# Altium PCB PCB1.PcbDoc
Units mm, origin at the board's own origin, x right, y up, seen from the top; angles counter-clockwise.
Board outline 95.25 x 86.87 mm, 2 copper layers (Top Layer, Bottom Layer); 64 components, 25 nets, 258 pads, 0 vias.
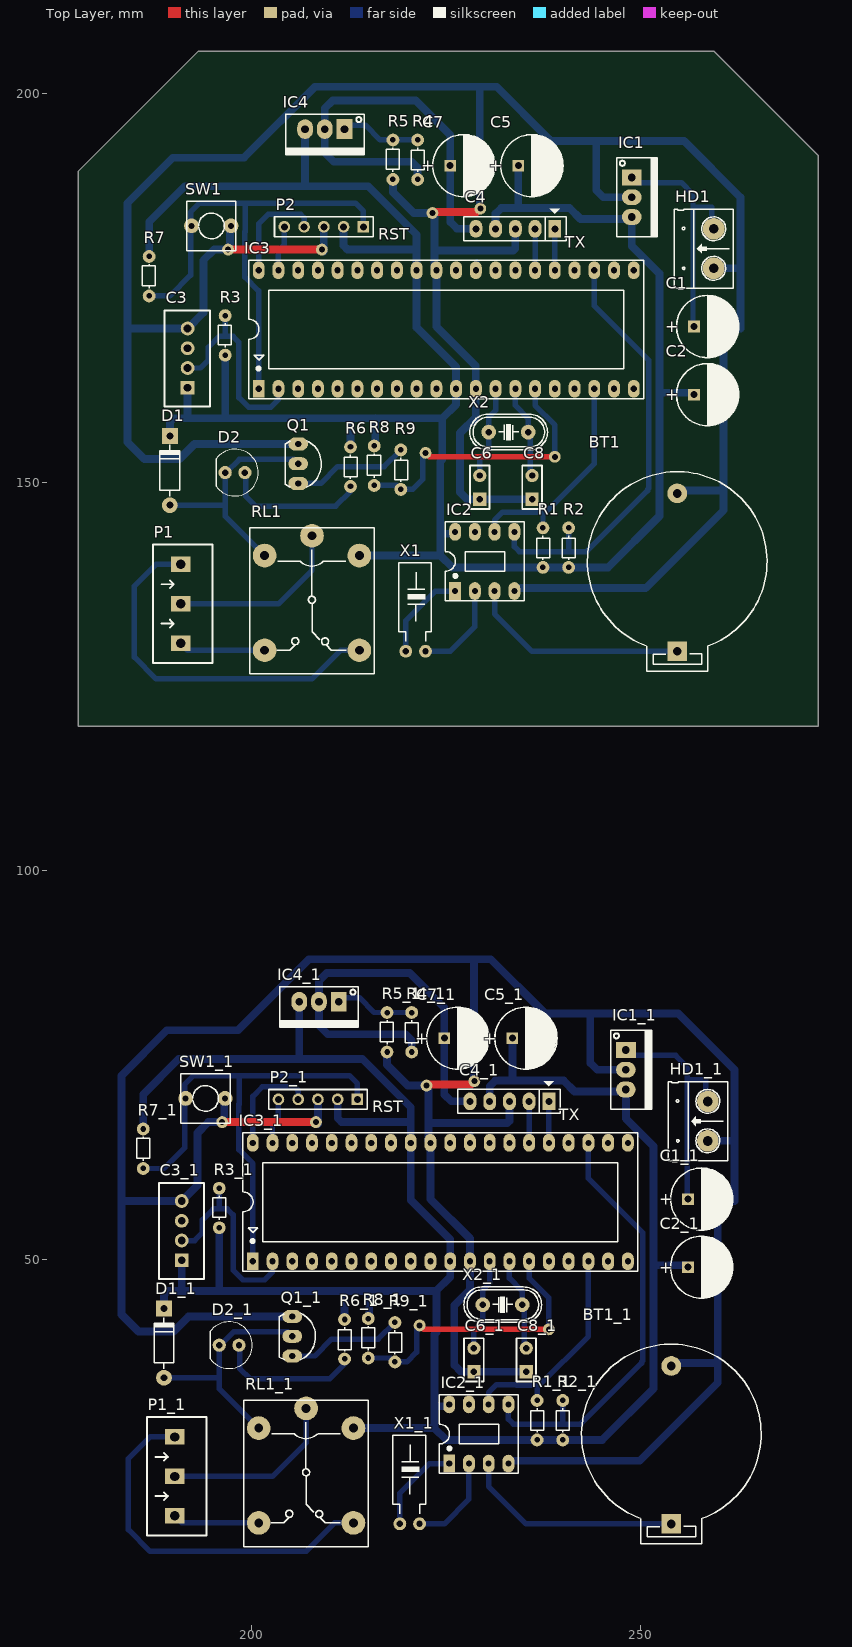
[diagram p0: Top Layer view]
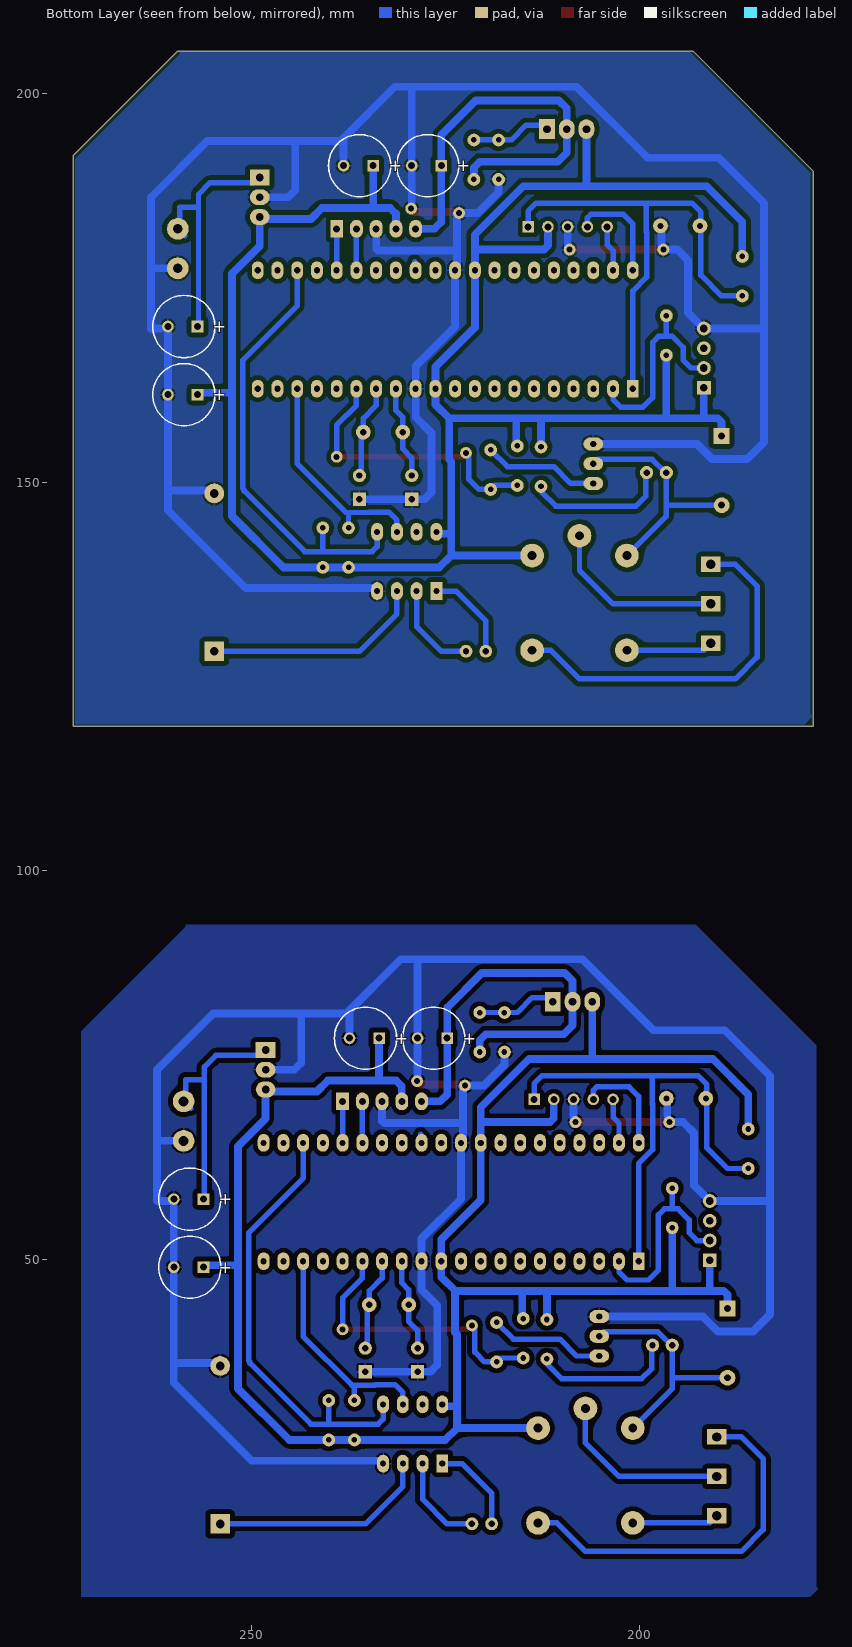
[diagram p1: Bottom Layer view, seen from below]

## Layer stack, top to bottom
Top Solder: solder mask 0.0102, Solder Resist, Dk 3.5
Top Layer: signal copper 0.0356
Dielectric 1: dielectric 0.32, FR-4, Dk 4.8
Bottom Layer: signal copper 0.0356
Bottom Solder: solder mask 0.0102, Solder Resist, Dk 3.5

## Board outline
177.673,118.618 177.673,189.992 193.167,205.486 259.461,205.486 272.923,192.024 272.923,118.618

## Design rules (kind name [scope] priority, off if disabled: settings)
Clearance [All] p1: gap=0.6 ignorepadtopadclearanceinfootprint=FALSE
PlaneClearance [All] p1: clearance=0.6
PolygonConnect [All] p1: connectstyle=Relief reliefconductorwidth=0.254 reliefentries=4 polygonreliefangle="90 Angle" airgapwidth=0.254
RoutingVias [All] p1: holewidth=0.711 width=1.27 viastyle="Through Hole" minholewidth=0.711 minwidth=1.27 maxholewidth=0.711 maxwidth=1.27
SolderMaskExpansion [All] p1: expansion=0.102
Width Width_1 [InNet('3.3V')] p1: maxlimit=1 minlimit=1 preferedwidth=1
Width GND [InNet('GND')] p2: maxlimit=1 minlimit=1 preferedwidth=1
Width VCC [InNet('VCC')] p3: maxlimit=1 minlimit=1 preferedwidth=1
Width [All] p4: maxlimit=0.7 minlimit=0.7 preferedwidth=0.7
29 further rules are at their usual default settings.

## Classes and differential pairs
component class sh: BT1 C1 C2 C3 C6 C7 C8 D1 D2 HD1 IC1 IC2 IC3 IC4 P1 P2 Q1 R1 R2 R3 R6 R7 R8 R9 RL1 SW1 X1 X2

## Components (designator, comment, footprint, x,y, rotation, side; value= is the part's Value field where it differs from the comment)
BT1 "PIN 3V" PIN3V 254.762,128.27 r90 top
BT1_1 "PIN 3V" PIN3V 254,16.002 r90 top (schematic designator BT1)
C1 "Cap Pol" "RADIAL E" 256.921,170.053 r0 top value=10uF
C1_1 "Cap Pol" "RADIAL E" 256.159,57.785 r0 top value=10uF (schematic designator C1)
C2 "Cap Pol" "RADIAL E" 256.921,161.29 r0 top value=10uF
C2_1 "Cap Pol" "RADIAL E" 256.159,49.022 r0 top value=10uF (schematic designator C2)
C3 "DHT11" DHT11 191.77,162.179 r90 top
C3_1 "DHT11" DHT11 191.008,49.911 r90 top (schematic designator C3)
C4 "JP5" JP5 239.014,182.626 r180 top
C4_1 "JP5" JP5 238.252,70.358 r180 top (schematic designator C4)
C5 "Cap Pol" "RADIAL E" 234.315,190.754 r0 top value=220uF
C5_1 "Cap Pol" "RADIAL E" 233.553,78.486 r0 top value=220uF (schematic designator C5)
C6 "Cap Non-pol" "Cap Non-Pol 3mm" 229.362,149.352 r90 top value=22pF
C6_1 "Cap Non-pol" "Cap Non-Pol 3mm" 228.6,37.084 r90 top value=22pF (schematic designator C6)
C7 "Cap Pol" "RADIAL E" 225.552,190.754 r0 top value=10uF
C7_1 "Cap Pol" "RADIAL E" 224.79,78.486 r0 top value=10uF (schematic designator C7)
C8 "Cap Non-pol" "Cap Non-Pol 3mm" 236.093,149.352 r90 top value=22pF
C8_1 "Cap Non-pol" "Cap Non-Pol 3mm" 235.331,37.084 r90 top value=22pF (schematic designator C8)
D1 "1N4007" D1A 189.484,147.066 r270 top
D1_1 "1N4007" D1A 188.722,34.798 r270 top (schematic designator D1)
D2 "LED" "LED-0 5mm BLUE" 197.866,151.257 r270 top
D2_1 "LED" "LED-0 5mm BLUE" 197.104,38.989 r270 top (schematic designator D2)
HD1 "Header 2" HED2 259.461,177.546 r90 top
HD1_1 "Header 2" HED2 258.699,65.278 r90 top (schematic designator HD1)
IC1 "LM7805" QTO-220 248.92,189.23 r270 top
IC1_1 "LM7805" QTO-220 248.158,76.962 r270 top (schematic designator IC1)
IC2 "DS1307" DIP8/W0.3 226.187,136.017 r0 top
IC2_1 "DS1307" DIP8/W0.3 225.425,23.749 r0 top (schematic designator IC2)
IC3 "18F4520" DIP40/W0.6 200.914,162.052 r0 top
IC3_1 "18F4520" DIP40/W0.6 200.152,49.784 r0 top (schematic designator IC3)
IC4 "LM317" QTO-220 211.963,195.453 r180 top
IC4_1 "LM317" QTO-220 211.201,83.185 r180 top (schematic designator IC4)
P1 "Header 3 - M" "Medium - Header 3" 190.881,139.446 r270 top
P1_1 "Header 3 - M" "Medium - Header 3" 190.119,27.178 r270 top (schematic designator P1)
P2 "ICSP-PIC" HDR1X5 214.376,182.88 r180 top
P2_1 "ICSP-PIC" HDR1X5 213.614,70.612 r180 top (schematic designator P2)
Q1 "C1815" QTO-92 205.994,152.4 r270 top
Q1_1 "C1815" QTO-92 205.232,40.132 r270 top (schematic designator Q1)
R1 "4k7" R1/8W 237.49,141.605 r270 top value="R1/4W - 1K"
R1_1 "4k7" R1/8W 236.728,29.337 r270 top value="R1/4W - 1K" (schematic designator R1)
R2 "4k7" R1/8W 240.792,141.605 r270 top value="R1/4W - 1K"
R2_1 "4k7" R1/8W 240.03,29.337 r270 top value="R1/4W - 1K" (schematic designator R2)
R3 "4k7" R1/8W 196.596,168.91 r90 top value="R1/4W - 1K"
R3_1 "4k7" R1/8W 195.834,56.642 r90 top value="R1/4W - 1K" (schematic designator R3)
R4 "240" R1/8W 221.361,191.516 r270 top value="R1/4W - 1K"
R4_1 "240" R1/8W 220.599,79.248 r270 top value="R1/4W - 1K" (schematic designator R4)
R5 "390" R1/8W 218.186,191.516 r90 top value="R1/4W - 1K"
R5_1 "390" R1/8W 217.424,79.248 r90 top value="R1/4W - 1K" (schematic designator R5)
R6 "1k" R1/8W 212.725,152.019 r270 top value="R1/4W - 1K"
R6_1 "1k" R1/8W 211.963,39.751 r270 top value="R1/4W - 1K" (schematic designator R6)
R7 "10k" R1/8W 186.817,176.53 r90 top value="R1/4W - 1K"
R7_1 "10k" R1/8W 186.055,64.262 r90 top value="R1/4W - 1K" (schematic designator R7)
R8 "10k" R1/8W 215.773,152.146 r90 top value="R1/4W - 1K"
R8_1 "10k" R1/8W 215.011,39.878 r90 top value="R1/4W - 1K" (schematic designator R8)
R9 "1k" R1/8W 219.202,151.638 r270 top value="R1/4W - 1K"
R9_1 "1k" R1/8W 218.44,39.37 r270 top value="R1/4W - 1K" (schematic designator R9)
RL1 "Relay 10A/12V" RL_SPDT_10A 207.772,143.129 r270 top value="Relay SPDT, 10A, 12V"
RL1_1 "Relay 10A/12V" RL_SPDT_10A 207.01,30.861 r270 top value="Relay SPDT, 10A, 12V" (schematic designator RL1)
SW1 "SW" SW2 197.358,183.007 r180 top value="SW chip 2 pin"
SW1_1 "SW" SW2 196.596,70.739 r180 top value="SW chip 2 pin" (schematic designator SW1)
X1 "32,768 Khz" XT32k 219.837,128.27 r90 top value=32,768khz
X1_1 "32,768 Khz" XT32k 219.075,16.002 r90 top value=32,768khz (schematic designator X1)
X2 "8Mhz" XT2 233.045,156.464 r180 top value=4Mhz
X2_1 "8Mhz" XT2 232.283,44.196 r180 top value=4Mhz (schematic designator X2)

## Footprints (in the part's own frame and the unit in brackets; to place one, negate y for a bottom-side part, rotate by r counter-clockwise, add the part's x,y. Pads: shape width x height; smd on the part's side, far side on the other; paste and mask are expansions set on the pad)
"Cap Non-Pol 3mm" [mil] "Capacitor, Radial; Body 5.6 x 2.5 mm (L x W typ); Pin Spacing 3 mm (typ); Solder Pad 35mil"
  rect 67x67 hole 32: 1(-60,0)
  round 67 hole 32: 2(60,0)
  silkscreen extent -110,-50 110,50, body extent -115,-33 115,34, height 245
D1A [mil] "Diode 1A, W 100mil, L 350mil"
  round 80 hole 35: 1(0,0)
  rect 80x80 hole 35: 2(-350,0)
  silkscreen extent -305,-50 -45,50, body extent -386,-33 34,36, height 84
DHT11 [mil]
  rect 70x70 hole 39.37 unplated: 1(0,0)
  round 70 hole 39.37 unplated: 2(100,0) 3(200,0)
  round 70 hole 39.37 unplated mask+4: 4(300,0)
  silkscreen extent -94,-114 392,116, body extent -87,-107 385,110, height 611
DIP8/W0.3 [mil] "8 PIN, W 300mil, Pin to pin 100mil"
  rect 60x90 hole 31: 1(0,0)
  oval 60x90 hole 31: 2(100,0) 3(200,0) 4(300,0) 5(300,300) 6(200,300) 7(100,300) 8(0,300)
  silkscreen extent -50,-50 350,350, body extent -50,-40 350,336, height 201
DIP40/W0.6 [mil] "40 PIN, W 600mil, Pin to pin 100mil"
  rect 60x90 hole 31: 1(0,0)
  oval 60x90 hole 31: 2(100,0) 3(200,0) 4(300,0) 5(400,0) 6(500,0) 7(600,0) 8(700,0) 9(800,0) 10(900,0) 11(1000,0) 12(1100,0) 13(1200,0) 14(1300,0) 15(1400,0) 16(1500,0) 17(1600,0) 18(1700,0) 19(1800,0) 20(1900,0) 21(1900,600) 22(1800,600) 23(1700,600) 24(1600,600) 25(1500,600) 26(1400,600) 27(1300,600) 28(1200,600) 29(1100,600) 30(1000,600) 31(900,600) 32(800,600) 33(700,600) 34(600,600) 35(500,600) 36(400,600) 37(300,600) 38(200,600) 39(100,600) 40(0,600)
  silkscreen extent -50,-50 1950,650, body extent -82,-10 1982,600, height 224
HDR1X5 [mm] "Connector; Header; 5 Position"
  rect 1.5x1.5 hole 0.9: 1(0,0)
  round 1.5 hole 0.9: 2(2.54,0) 3(5.08,0) 4(7.62,0) 5(10.16,0)
  silkscreen extent -1.27,-1.27 11.43,1.27, body extent -1.27,-1.27 11.43,1.27, height 7
HED2 [mil] "Header 2, 2 pin, hight 300mil, Pin to Pin 200, Colour Green"
  round 110 hole 50: 1(0,0) 2(200,0)
  silkscreen extent -106,-100 300,200, body extent -92,-140 302,155, height 394
JP5 [mil] "JP5"
  rect 65x90 hole 36: 1(0,0)
  oval 65x90 hole 36: 2(100,0) 3(200,0) 4(300,0) 5(400,0)
  silkscreen extent -57,-101 461,60, body extent -48,-53 448,45, height 323
"LED-0 5mm BLUE" [mil] "Typical LED; BLUE; 2 Leads; Solder Pad 35mil"
  round 67 hole 32: 1(0,50) 2(0,-50)
  silkscreen extent -118,-96 118,118, body extent -118,-96 119,117, height 345
"Medium - Header 3" [mm]
  rect 2x2.5 hole 1.2: 1(0,0) 2(5.08,0) 3(10.147,0)
  silkscreen extent -2.54,-3.58 12.7,4.06, body extent -2.42,-3.51 12.58,3.99, height 10
PIN3V [mil] "Socket PIN 3V"
  rect 100x100 hole 45: 1(0,0)
  round 100 hole 45: 2(800,0)
  silkscreen extent -100,-455 910,455, body extent -128,-447 1002,449, height 278
QTO-92 [mil] "TO-92"
  oval 66x100 hole 32: 1(-100,0) 2(0,0) 3(100,0)
  silkscreen extent -117,-65 120,118, body extent -109,-66 109,95, height 245
QTO-220 [mil] "TO-220 - 1-2-3"
  rect 80x100 hole 39: 1(0,0)
  oval 80x100 hole 39: 2(100,0) 3(200,0)
  silkscreen extent -100,-76 300,130, body extent -119,-64 322,121, height 755
R1/8W [mil] "R 1/8W, 2 pin, 300mil"
  round 65 hole 28: 1(-100,0) 2(100,0)
  silkscreen extent -60,-32 61,34, body extent -135,-35 135,37, height 86
"RADIAL E" [mm] "Capacitor, Electrolytic, Radial; Body 8 x 10.5 mm (Dia.xH typ); Pin Spacing 3.5 mm (typ)"
  rect 1.5x1.5 hole 0.9: 1(0,0)
  round 1.5 hole 0.9: 2(3.81,0)
  silkscreen extent -2.25,-4 5.75,4, body extent -2.24,-3.99 5.76,4.01, height 11.74
RL_SPDT_10A [mil] "Relay SPDT, 5 pin, 10A,W 650mil, L 800mil, H 800mil"
  round 120 hole 45: 1(0,0) 2(580,240) 3(580,-240) 4(100,-240) 5(100,240)
  silkscreen extent -40,-315 700,315
SW2 [mil] "SW button 2pin, 250x 250 mil"
  round 75 hole 31: 1(0,0) 2(200,0)
  silkscreen extent -25,-125 225,125
XT2 [mil] "Footpin for Crystal 2 pin"
  round 75 hole 34: 1(-100,0) 2(100,0)
  silkscreen extent -198,-90 195,90, body extent -233,-93 213,90, height 138
XT32k [mil] "Crystal 32k, 2 pin, real timer for DS1307"
  round 65 hole 32: 1(0,0) 2(0,-100)
  silkscreen extent 50,-130 449,36

## Part data
BT1 BT1_1: "Battery 3VDC"
C1 C1_1 C2 C2_1 C5 C5_1 C7 C7_1: "Polarized Capacitor", LatestRevisionDate=17-Jul-2002, LatestRevisionNote="Re-released for DXP Platform.", PackageReference=POLAR0.8, Published=8-Jun-2000, Publisher="Altium Limited"
C3 C3_1: Manufacturer="Würth Elektronik eiSos GmbH", partNo=613004143121, ComponentLink1 Description=Manufacturer, ComponentLink1URL=http://www.we-online.com, ComponentLink2 Description=Datasheet, ComponentLink2URL=http://katalog.we-online.de/em/datasheet/6130xx143121.pdf, Created by="Karrer Zheng", Created Date="29 March 2013", NoPins=04
C6 C6_1 C8 C8_1: "Non-polarized Capacitor", LatestRevisionDate=17-Jul-2002, LatestRevisionNote="Re-released for DXP Platform.", PackageReference=RAD-0.3, Published=8-Jun-2000, Publisher="Altium Limited"
D1 D1_1: library part D1A, "Diode 1A"
D2 D2_1: "Typical LED", LatestRevisionDate=08-Jul-2005, LatestRevisionNote="Mech Layer 1 removed.", PackageReference=LED-1, Published=8-Jun-2000, Publisher="Altium Limited"
HD1 HD1_1: library part Hed2, "Header 2 (Green)"
IC1 IC1_1: library part LM78xx, "On ap +, from + 5 to + 24VDC", =LM7808
IC2 IC2_1: "Real Timer Serial"
IC3 IC3_1: "32KB Flash, 1536B RAM, 256B EFROM, 40-Pin PDIP", Copyright by=VanDungEvn
IC4 IC4_1: library part LM317_1, "Adj Voltage +1.2 -> +37V"
P1 P1_1: "Header, 3-Pin, Medium", LatestRevisionDate=17-Jul-2002, LatestRevisionNote="Re-released for DXP Platform.", Publisher="Altium Limited"
P2 P2_1: "Header, 5-Pin", LatestRevisionDate=17-Jul-2002, LatestRevisionNote="Re-released for DXP Platform.", Publisher="Altium Limited"
Q1 Q1_1: library part C1815_1, "NPN 600mW, ECB", =C2383
R1 R1_1 R2 R2_1 R3 R3_1 R4 R4_1 R5 R5_1 R6 R6_1 R7 R7_1 R8 R8_1 R9 R9_1: library part R, "Resistor 1/4W"
RL1 RL1_1: library part "Relay 1", "Relay SPDT,10A - 12VDC 5 Pin", ="Relay SPDT, 10A, 24V"
SW1 SW1_1: library part SW2, "Switch button 2 pin"
X1 X1_1: library part XT32k, "Crystal 32,768kHz for timer real"
X2 X2_1: library part XT2, "Crystal For all Crystal 2pin."

## Free pads (board coordinates)
  round 1.524 hole 0.762: 2(222.504,72.39) 2(223.266,184.658) 3(228.663,72.962) 3(229.425,185.23) 4(208.28,67.691) 4(209.042,179.959) 5(196.215,67.691) 5(196.977,179.959) 6(221.615,41.529) 6(222.377,153.797) 7(238.252,41.021) 7(239.014,153.289)

## Nets (pads, with @x,y where several pads share a name; then routed paths per layer and width w, separated by ;. In a path a pad name is that pad's centre, name@x,y a point inside that pad or via, vN(x,y) a via of type N, cw(c..) or ccw(c..) an arc to the next point about the centre after c; other vN are vias at no path point)
3.3V: C4.5 C7.1 IC4.2 R4.2 | length 53.2
  Bottom Layer w1: R4.2 221.361,190.5 220.599,191.262 210.566,191.262 209.423,192.405 IC4.2 209.423,198.12 210.439,199.136 221.107,199.136 225.552,194.691 C7.1 225.552,183.515 226.441,182.626 C4.5
GND: BT1.2 C1.2 C2.2 C3.4 C4.3 C5.2 C6.1 C7.2 C8.1 HD1.1 IC1.2 IC2.4 IC3.12 IC3.31 P2.3 pad.2@223.266,184.658 pad.3@229.425,185.23 pad.4@209.042,179.959 pad.5@196.977,179.959 Q1.1 R5.1 SW1.1 | length 374.3
  Top Layer w1: pad.5@196.977,179.959 pad.4@209.042,179.959 ; pad.2@223.266,184.658 223.67,184.785 228.981,184.785 pad.3@229.425,185.23
  Bottom Layer w1: pad.5@196.977,179.959 195.199,179.959 193.802,178.562 193.802,171.831 C3.4 184.023,169.799 ; pad.5@197.231,179.918 SW1.1@197.231,182.626 ; Q1.1 192.659,154.94 190.729,153.01 186.207,153.01 184.023,155.194 184.023,169.799 ; pad.4@209.042,179.959 209.296,179.705 P2.3 ; R5.1 218.186,187.325 220.853,184.658 223.266,184.658 pad.2@223.583,184.468 ; pad.2@223.52,184.277 223.52,177.546 IC3.31 223.774,170.053 228.854,164.973 IC3.12 228.854,158.384 226.822,156.352 226.822,148.717 227.711,147.828 C6.1 C8.1 ; 223.774,179.832 233.664,179.832 233.934,180.102 C4.3 ; pad.3@229.489,185.166 229.425,185.23 229.362,185.293 C7.2 229.362,200.914 ; IC2.4 234.188,136.398 250.698,136.398 260.731,146.431 260.731,148.971 ; C5.2 238.125,194.056 238.252,194.183 ; IC1.2 245.237,186.69 244.348,187.579 244.348,193.929 ; BT1.2 255.143,148.971 260.731,148.971 ; HD1.1 262.636,177.546 ; 184.023,169.799 184.023,185.928 189.865,191.77 199.009,191.77 208.153,200.914 229.362,200.914 ; 229.362,200.914 231.521,200.914 238.252,194.183 ; 238.252,194.183 238.506,193.929 244.348,193.929 ; 244.348,193.929 255.651,193.929 262.89,186.69 262.89,169.799 260.985,169.799 C1.2 C2.2 260.731,148.971
NetBT1_1: BT1.1 IC2.3 | length 28.4
  Bottom Layer w0.7: IC2.3 231.267,133.096 236.093,128.27 BT1.1
NetC1_1: C1.1 HD1.2 IC1.1 | length 32.4
  Bottom Layer w0.7: IC1.1 249.594,188.556 255.309,188.556 256.794,187.071 256.794,185.42 ; C1.1 256.794,170.18 256.794,185.42 ; HD1.2@258.572,181.737 HD1.2 259.207,182.88 259.207,185.42 256.794,185.42
NetC3_2: C3.2 IC3.2 R3.2 | length 26.8
  Bottom Layer w0.7: C3.2 193.421,164.719 194.437,165.735 194.437,167.386 195.834,168.783 196.596,168.783 ; R3.2 196.596,168.783 ; IC3.2 203.454,160.655 202.438,159.639 199.644,159.639 198.374,160.909 198.374,168.021 197.612,168.783 196.596,168.783
NetC6_2: C6.2 IC3.13 X2.2 | length 12
  Bottom Layer w0.7: C6.2 229.362,153.162 230.505,154.305 X2.2 230.505,158.369 231.394,159.258 IC3.13
NetC8_2: C8.2 IC3.14 X2.1 | length 12.1
  Bottom Layer w0.7: IC3.14 233.934,159.893 235.585,158.242 X2.1 235.839,156.21 235.839,151.13 C8.2
NetD1_1: D1.1 D2.2 Q1.2 RL1.4 | length 30.2
  Bottom Layer w0.7: D1.1 196.596,147.066 ; RL1.4 196.596,145.669 196.596,147.066 ; Q1.2 205.436,152.958 198.431,152.958 196.731,151.257 D2.2 196.596,147.066
NetD2_1: D2.1 R6.2 | length 18.5
  Bottom Layer w0.7: D2.1 199.263,151.13 199.263,148.209 200.533,146.939 210.82,146.939 212.725,148.844 R6.2
NetIC2_1: IC2.1 X1.1 | length 11.9
  Bottom Layer w0.7: X1.1 219.837,132.207 223.647,136.017 IC2.1
NetIC2_2: IC2.2 X1.2 | length 12.2
  Bottom Layer w0.7: X1.2 225.552,128.27 228.727,131.445 IC2.2
NetIC4_1: IC4.1 R4.1 R5.2 | length 10.4
  Bottom Layer w0.7: IC4.1 212.471,195.961 214.63,195.961 216.535,194.056 R5.2 R4.1
NetP1_1: P1.1 RL1.2 | length 47.9
  Bottom Layer w0.7: P1.1 187.706,139.446 184.912,136.652 184.912,127.508 187.706,124.714 207.772,124.714 211.455,128.397 RL1.2
NetP1_2: P1.2 RL1.1 | length 23.1
  Bottom Layer w0.7: P1.2 203.454,134.366 207.772,138.684 RL1.1
NetP1_3: P1.3 RL1.3 | length 11.2
  Bottom Layer w0.7: P1.3 191.783,128.397 RL1.3
NetQ1_3: Q1.3 R9.1 | length 15
  Bottom Layer w0.7: Q1.3 208.915,149.86 211.074,152.019 217.043,152.019 R9.1
PGC: IC3.39 P2.5 | length 5.6
  Bottom Layer w0.7: IC3.39 203.454,179.832 204.216,180.594 P2.5@204.216,182.626
PGD: IC3.40 P2.4 | length 13.8
  Bottom Layer w0.7: IC3.40@200.787,177.292 IC3.40 200.914,183.261 202.133,184.48 206.324,184.48 206.756,184.048 P2.4
ROLE: IC3.15 pad.6@222.377,153.797 pad.7@239.014,153.289 R8.1 R9.2 | length 36.7
  Top Layer w0.7: pad.6@222.377,153.797 222.885,153.289 pad.7@239.014,153.289
  Bottom Layer w0.7: R8.1 218.694,149.606 R9.2 220.726,149.098 221.996,150.368 pad.6@221.996,153.67 ; IC3.15 236.474,159.893 239.014,157.353 pad.7@239.014,153.543
RST: IC3.1 P2.1 R7.1 SW1.2 | length 64.3
  Bottom Layer w0.7: R7.1 189.484,173.99 192.151,176.657 192.151,184.785 193.294,185.928 199.161,185.928 ; IC3.1 200.914,174.631 199.136,176.409 199.136,182.236 199.161,182.26 199.161,185.928 ; P2.1 214.376,184.912 213.36,185.928 199.161,185.928
RX: C4.2 IC3.26 | length 4.4
  Bottom Layer w0.7: IC3.26 C4.2@236.474,181.737
SCL: IC2.6 IC3.18 R1.1 | length 28.5
  Bottom Layer w0.7: IC2.6@231.267,144.145 231.267,145.161 232.283,146.177 234.84,146.177 234.89,146.127 237.49,146.127 ; R1.1 237.49,146.127 ; IC3.18 244.094,152.4 237.821,146.127 237.49,146.127
SDA: IC2.5 IC3.23 R2.1 | length 56.9
  Bottom Layer w0.7: IC2.5 233.807,141.732 234.442,141.097 240.792,141.097 ; R2.1 240.792,141.097 ; IC3.23 244.094,172.72 251.079,165.735 251.079,149.225 250.952,149.098 250.952,148.938 243.111,141.097 240.792,141.097
TX: C4.1 IC3.25 | length 4.4
  Bottom Layer w0.7: IC3.25 C4.1@239.014,181.737
VCC: C2.1 C3.1 C4.4 C5.1 D1.2 IC1.3 IC2.8 IC3.11 IC3.32 IC4.3 P2.2 R1.2 R2.2 R3.1 R6.1 R7.2 R8.2 RL1.5 | length 277.7
  Bottom Layer w1: R7.2 186.817,183.515 191.389,188.087 206.883,188.087 ; D1.2 189.484,157.734 189.992,158.242 191.77,158.242 ; C3.1 191.77,158.242 ; R3.1 196.596,158.242 ; IC4.3 206.883,188.087 ; P2.2 211.836,180.467 212.344,179.959 221.234,179.959 ; R6.1 212.725,158.242 ; RL1.5 224.282,140.589 ; R8.2 215.9,154.813 215.9,158.242 ; IC2.8 225.933,143.383 224.282,143.383 ; C4.4 231.394,184.579 232.108,185.293 234.315,185.293 ; C5.1 234.315,185.293 ; C2.1 256.667,161.544 252.476,161.544 ; 191.77,158.242 196.596,158.242 ; 196.596,158.242 212.725,158.242 ; 206.883,188.087 215.011,188.087 221.234,181.864 221.234,179.959 ; 212.725,158.242 215.9,158.242 ; 215.9,158.242 224.536,158.242 ; 221.234,179.959 IC3.32 221.234,169.926 226.314,164.846 IC3.11 226.314,160.02 224.536,158.242 ; 224.282,140.589 225.806,139.065 R1.2 R2.2 245.872,139.065 252.476,145.669 252.476,161.544 ; 224.282,140.589 224.282,143.383 ; 224.282,143.383 224.282,152.654 224.536,152.908 224.536,158.242 ; 234.315,185.293 240.919,185.293 242.316,183.896 248.666,183.896 IC1.3 248.92,180.419 252.476,176.863 252.476,161.544
pads on no net: BT1_1.1 BT1_1.2 C1_1.1 C1_1.2 C2_1.1 C2_1.2 C3.3 C3_1.1 C3_1.2 C3_1.3 C3_1.4 C4_1.1 C4_1.2 C4_1.3 C4_1.4 C4_1.5 C5_1.1 C5_1.2 C6_1.1 C6_1.2 C7_1.1 C7_1.2 C8_1.1 C8_1.2 D1_1.1 D1_1.2 D2_1.1 D2_1.2 HD1_1.1 HD1_1.2 IC1_1.1 IC1_1.2 IC1_1.3 IC2.7 IC2_1.1 IC2_1.2 IC2_1.3 IC2_1.4 IC2_1.5 IC2_1.6 IC2_1.7 IC2_1.8 IC3.3 IC3.4 IC3.5 IC3.6 IC3.7 IC3.8 IC3.9 IC3.10 IC3.16 IC3.17 IC3.19 IC3.20 IC3.21 IC3.22 IC3.24 IC3.27 IC3.28 IC3.29 IC3.30 IC3.33 IC3.34 IC3.35 IC3.36 IC3.37 IC3.38 IC3_1.1 IC3_1.2 IC3_1.3 IC3_1.4 IC3_1.5 IC3_1.6 IC3_1.7 IC3_1.8 IC3_1.9 IC3_1.10 IC3_1.11 IC3_1.12 IC3_1.13 IC3_1.14 IC3_1.15 IC3_1.16 IC3_1.17 IC3_1.18 IC3_1.19 IC3_1.20 IC3_1.21 IC3_1.22 IC3_1.23 IC3_1.24 IC3_1.25 IC3_1.26 IC3_1.27 IC3_1.28 IC3_1.29 IC3_1.30 IC3_1.31 IC3_1.32 IC3_1.33 IC3_1.34 IC3_1.35 IC3_1.36 IC3_1.37 IC3_1.38 IC3_1.39 IC3_1.40 IC4_1.1 IC4_1.2 IC4_1.3 P1_1.1 P1_1.2 P1_1.3 P2_1.1 P2_1.2 P2_1.3 P2_1.4 P2_1.5 Q1_1.1 Q1_1.2 Q1_1.3 R1_1.1 R1_1.2 R2_1.1 R2_1.2 R3_1.1 R3_1.2 R4_1.1 R4_1.2 R5_1.1 R5_1.2 R6_1.1 R6_1.2 R7_1.1 R7_1.2 R8_1.1 R8_1.2 R9_1.1 R9_1.2 RL1_1.1 RL1_1.2 RL1_1.3 RL1_1.4 RL1_1.5 SW1_1.1 SW1_1.2 X1_1.1 X1_1.2 X2_1.1 X2_1.2
copper on no net: | length 1212.8
  Top Layer w0.7: 221.615,41.529 222.123,41.021 238.252,41.021
  Top Layer w1: 196.215,67.691 208.28,67.691 ; 222.504,72.39 222.908,72.517 228.219,72.517 228.663,72.962
  Bottom Layer w0.7: 186.055,61.722 188.722,61.722 191.389,64.389 191.389,72.517 192.532,73.66 198.399,73.66 ; 188.722,34.798 195.834,34.798 ; 190.119,17.031 191.021,16.129 200.914,16.129 ; 190.119,22.098 202.692,22.098 207.01,26.416 207.01,30.861 ; 190.119,27.178 186.944,27.178 184.15,24.384 184.15,15.24 186.944,12.446 207.01,12.446 210.693,16.129 213.106,16.129 ; 191.008,52.451 192.659,52.451 193.675,53.467 193.675,55.118 195.072,56.515 195.834,56.515 ; 195.834,59.182 195.834,56.515 ; 198.374,38.989 198.501,38.862 198.501,35.941 199.771,34.671 210.058,34.671 211.963,36.576 211.963,37.211 ; 200.025,65.024 200.152,65.024 200.152,70.993 201.371,72.212 205.562,72.212 205.994,71.78 205.994,70.612 ; 200.152,49.784 200.152,62.363 198.374,64.141 198.374,69.968 198.399,69.992 198.399,73.66 ; 200.914,28.321 195.834,33.401 195.834,34.798 ; 202.692,49.784 202.692,48.387 201.676,47.371 198.882,47.371 197.612,48.641 197.612,55.753 196.85,56.515 195.834,56.515 ; 202.692,65.024 202.692,67.564 203.454,68.326 203.454,70.358 ; 205.232,37.592 208.153,37.592 210.312,39.751 216.281,39.751 218.44,41.91 ; 205.232,40.132 204.674,40.69 197.669,40.69 195.969,38.989 195.834,38.989 195.834,34.798 ; 211.201,83.185 211.709,83.693 213.868,83.693 215.773,81.788 217.424,81.788 220.599,81.788 ; 213.614,70.612 213.614,72.644 212.598,73.66 198.399,73.66 ; 215.011,37.338 217.932,37.338 218.44,36.83 219.964,36.83 221.234,38.1 221.234,41.402 ; 219.075,16.002 219.075,19.939 222.885,23.749 225.425,23.749 ; 221.615,16.002 224.79,16.002 227.965,19.177 227.965,23.749 ; 228.219,65.913 228.219,66.122 ; 228.6,38.608 228.6,40.894 229.743,42.037 229.743,44.196 229.743,46.101 230.632,46.99 230.632,49.784 ; 228.981,178.181 228.981,178.39 ; 230.505,23.749 230.505,20.828 235.331,16.002 254,16.002 ; 230.505,31.877 230.505,32.893 231.521,33.909 234.078,33.909 234.128,33.859 236.728,33.859 ; 233.045,31.369 233.045,29.464 233.68,28.829 240.03,28.829 ; 233.172,49.784 233.172,47.625 234.823,45.974 234.823,44.196 235.077,43.942 235.077,38.862 235.331,38.608 ; 235.712,49.784 235.712,47.625 238.252,45.085 238.252,41.275 ; 235.712,65.024 235.712,69.469 ; 236.728,31.877 236.728,33.859 ; 238.252,65.024 238.252,69.469 ; 240.03,31.877 240.03,28.829 ; 243.332,49.784 243.332,40.132 237.059,33.859 236.728,33.859 ; 243.332,65.024 243.332,60.452 250.317,53.467 250.317,36.957 250.19,36.83 250.19,36.67 242.349,28.829 240.03,28.829 ; 245.872,65.278 245.872,65.399 ; 246.634,177.546 246.634,177.667 ; 248.158,76.962 248.832,76.288 254.547,76.288 256.032,74.803 256.032,73.152 ; 256.159,57.785 256.032,57.912 256.032,73.152 ; 257.81,69.469 258.699,70.358 258.445,70.612 258.445,73.152 256.032,73.152
  Bottom Layer w1: 186.055,66.802 186.055,71.247 190.627,75.819 206.121,75.819 ; 188.722,43.688 188.722,45.466 189.23,45.974 191.008,45.974 ; 191.008,49.911 191.008,45.974 ; 195.834,54.102 195.834,45.974 ; 196.215,67.691 194.437,67.691 193.04,66.294 193.04,59.563 191.008,57.531 183.261,57.531 ; 196.469,67.65 196.469,70.358 ; 205.232,42.672 191.897,42.672 189.967,40.742 185.445,40.742 183.261,42.926 183.261,57.531 ; 206.121,83.185 206.121,75.819 ; 208.28,67.691 208.534,67.437 208.534,70.612 ; 211.074,70.612 211.074,68.199 211.582,67.691 220.472,67.691 ; 211.963,42.291 211.963,45.974 ; 213.106,28.321 223.52,28.321 ; 215.011,42.418 215.138,42.545 215.138,45.974 ; 217.424,76.708 217.424,75.057 220.091,72.39 222.504,72.39 222.821,72.2 ; 220.599,76.708 220.599,78.232 219.837,78.994 209.804,78.994 208.661,80.137 208.661,83.185 208.661,85.852 209.677,86.868 220.345,86.868 224.79,82.423 224.79,78.486 224.79,71.247 225.679,70.358 228.092,70.358 ; 222.758,72.009 222.758,65.278 223.012,65.024 223.012,57.785 228.092,52.705 228.092,49.784 228.092,46.116 226.06,44.084 226.06,36.449 226.949,35.56 228.6,35.56 235.331,35.56 ; 223.012,67.564 232.902,67.564 233.172,67.834 233.172,70.358 ; 225.425,31.369 225.171,31.115 223.52,31.115 ; 228.727,72.898 228.663,72.962 228.6,73.025 228.6,78.486 228.6,88.646 ; 230.632,70.358 230.632,72.311 231.346,73.025 233.553,73.025 ; 233.045,23.749 233.426,24.13 249.936,24.13 259.969,34.163 259.969,36.703 ; 233.553,78.486 233.553,73.025 ; 237.363,78.486 237.363,81.788 237.49,81.915 ; 248.158,74.422 244.475,74.422 243.586,75.311 243.586,81.661 ; 254,36.322 254.381,36.703 259.969,36.703 ; 256.159,49.022 255.905,49.276 251.714,49.276 ; 258.699,65.278 261.874,65.278 ; 183.261,57.531 183.261,73.66 189.103,79.502 198.247,79.502 207.391,88.646 228.6,88.646 ; 191.008,45.974 195.834,45.974 ; 195.834,45.974 211.963,45.974 ; 206.121,75.819 214.249,75.819 220.472,69.596 220.472,67.691 ; 211.963,45.974 215.138,45.974 ; 215.138,45.974 223.774,45.974 ; 220.472,67.691 220.472,65.024 220.472,57.658 225.552,52.578 225.552,49.784 225.552,47.752 223.774,45.974 ; 223.52,28.321 223.52,31.115 ; 223.52,28.321 225.044,26.797 236.728,26.797 240.03,26.797 245.11,26.797 251.714,33.401 251.714,49.276 ; 223.52,31.115 223.52,40.386 223.774,40.64 223.774,45.974 ; 228.6,88.646 230.759,88.646 237.49,81.915 ; 233.553,73.025 240.157,73.025 241.554,71.628 247.904,71.628 248.158,71.882 248.158,68.151 251.714,64.595 251.714,49.276 ; 237.49,81.915 237.744,81.661 243.586,81.661 ; 243.586,81.661 254.889,81.661 262.128,74.422 262.128,57.531 260.223,57.531 259.969,57.785 259.969,49.022 259.969,36.703

## Polygon pours and split planes (outlines as drawn)
GND on Bottom Layer "bottom" (solid, pour order 10): 193.294,205.232 193.421,205.359 259.207,205.359 259.207,205.105 272.669,191.643 272.669,118.872 178.816,118.872 177.8,119.888 178.054,120.142 178.054,189.865 193.548,205.359
no net on Bottom Layer "bottom" (solid, pour order 12): 192.532,92.964 192.659,93.091 258.445,93.091 258.445,92.837 271.907,79.375 271.907,6.604 178.054,6.604 177.038,7.62 177.292,7.874 177.292,77.597 192.786,93.091

## Silkscreen, mask and mechanical layers (free items; w line width, h text height)
Top Overlay:
  text "RST" at 216.281,181.229 h1.52
  text "TX" at 240.284,180.213 h1.52
  text "RST" at 215.519,68.961 h1.52
  text "TX" at 239.522,67.945 h1.52
Mechanical 1:
  lines w1.2: 176.911,6.35 176.911,77.724 192.405,93.218 258.699,93.218 272.161,79.756 272.161,6.35 176.911,6.35 ; 177.673,118.618 272.923,118.618 272.923,192.024 259.461,205.486 193.167,205.486 177.673,189.992 177.673,118.618

## Text inside footprints (layer, text, board x,y; h text height)
C1: Top Overlay "+" at 253.196,169.303 h1.5; Bottom Overlay "+" at 253.196,169.303 h1.5
C1_1: Top Overlay "+" at 252.434,57.035 h1.5; Bottom Overlay "+" at 252.434,57.035 h1.5
C2: Top Overlay "+" at 253.196,160.54 h1.5; Bottom Overlay "+" at 253.196,160.54 h1.5
C2_1: Top Overlay "+" at 252.434,48.272 h1.5; Bottom Overlay "+" at 252.434,48.272 h1.5
C5: Top Overlay "+" at 230.59,190.004 h1.5; Bottom Overlay "+" at 230.59,190.004 h1.5
C5_1: Top Overlay "+" at 229.828,77.736 h1.5; Bottom Overlay "+" at 229.828,77.736 h1.5
C7: Top Overlay "+" at 221.827,190.004 h1.5; Bottom Overlay "+" at 221.827,190.004 h1.5
C7_1: Top Overlay "+" at 221.065,77.736 h1.5; Bottom Overlay "+" at 221.065,77.736 h1.5